# EAGLE board Board (EAGLE 9.7.0)
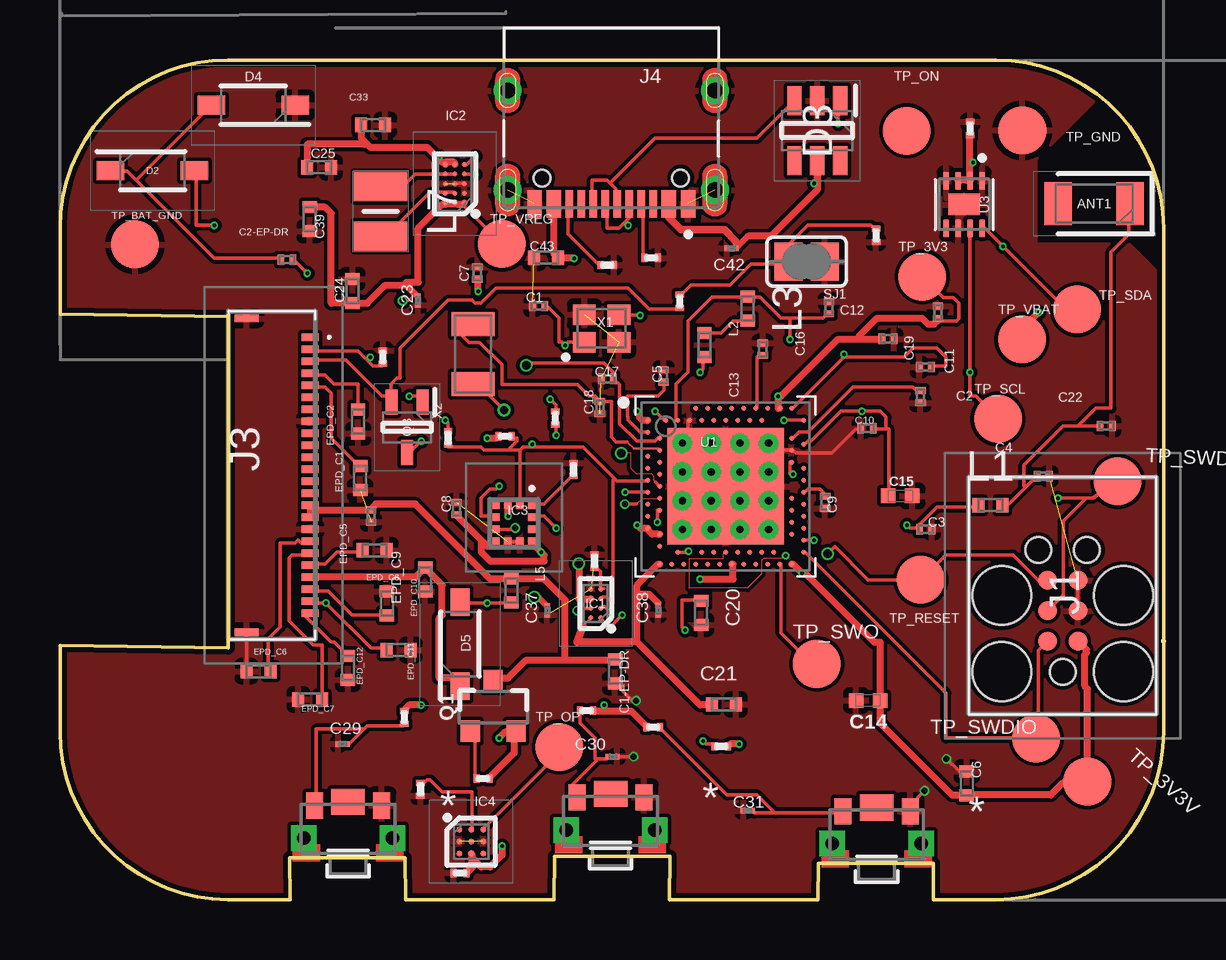
[diagram p0: board, top side]
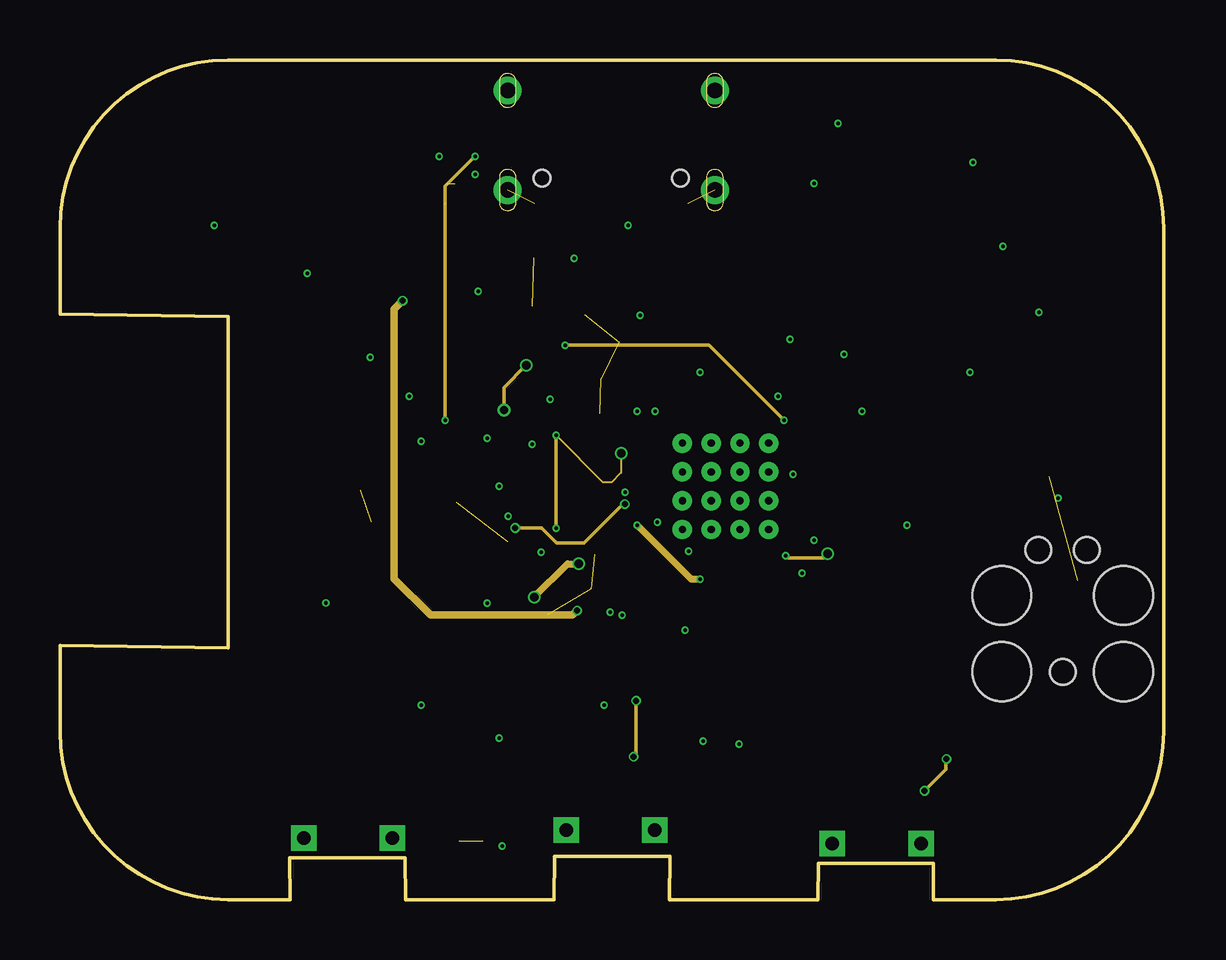
[diagram p1: board, inner layer Route2]
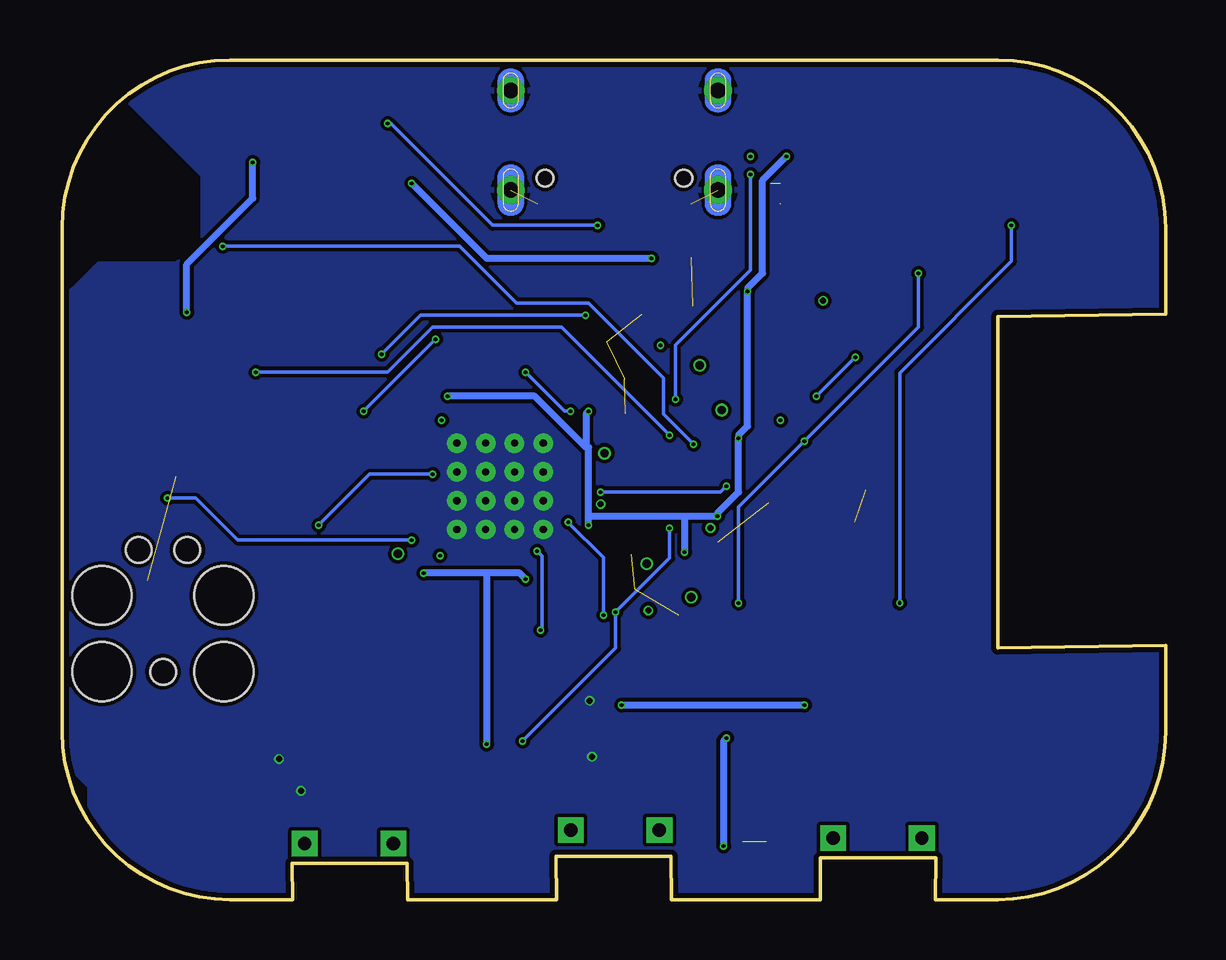
[diagram p2: board, bottom side, seen from below]

Size 46 x 35 mm. Coordinates in mm from the lower left corner, seen from the top.
Outline: 39,0 36.4,0 36.41,1.5 31.61,1.5 31.6,0 25.4,0 25.42,1.81 20.62,1.81 20.6,0 14.4,0 14.38,1.75 9.58,1.75 9.6,0 7,0 arc-90 0,7 0,10.6 7,10.5 7,24.3 0,24.4 0,28 arc-90 7,35 39,35 arc-90 46,28 46,7 arc-90 39,0
Copper layers (1+2*15+16): Top 0.035mm / dielectric 1.5mm / Route2 0.035mm / dielectric 0.15mm / Route15 0.035mm / dielectric 0.2mm / Bottom 0.035mm
Design rules "Fusion Electronics Design Rules *": minimum track width 6mil, minimum drill 0.15mm, track to track 6mil, track to pad 0.13mm, pad to pad 0.13mm, via to via 0.13mm, smd to smd 0.13mm, copper to edge 0.2mm, drill to drill 6mil, minimum pad ring 10mil, minimum via ring 0.075mm, stop-mask expansion 4mil, vias tented up to drill 9999mil, thermal gap 10mil
Net classes: 0 default: width 0.15 mm; 1 Putere: width 0.3 mm

## Footprints (pad centres in the part's own frame; a part is rotated, then mirrored left to right if it is on the bottom)
2450AT18B100E_ANTC3216X140N = smd 1.15 x 1.8: 1 -1.5,0; 2 1.5,0
NORDIC_NRF_3_RESC0201_L = smd 0.28 x 0.43: 1 -0.255,0; 2 0.255,0
NORDIC_NRF_3_RESC0402_L = smd 0.5 x 0.6: 1 -0.5,0; 2 0.5,0
0402-TIGHT = smd 0.6 x 0.6: 1 -0.5,0; 2 0.5,0
GRM011R60J152KE01L_2_CAPC0201X13N = smd 0.22 x 0.23: 1 -0.185,0; 2 0.185,0
GRM011R60J152KE01L_1_0201 = smd 0.35 x 0.25: 1 0,0.275; 2 0,-0.275
ESP32_C6_LIBRARY_5_SOD3716X135N = smd 1.15 x 0.8: 1 -1.75,0; 2 1.75,0
ESP32_C6_LIBRARY_3_SOT95P280X145-6N = smd 1.2 x 0.6: 1 -1.25,0.95; 2 -1.25,0; 3 -1.25,-0.95; 4 1.25,-0.95; 5 1.25,0; 6 1.25,0.95
BQ25180YBGR_BGA8C40P2X4_100X155X50 = smd 0.2 x 0.2: A1 -0.2,0.6; A2 0.2,0.6; B1 -0.2,0.2; B2 0.2,0.2; C1 -0.2,-0.2; C2 0.2,-0.2; D1 -0.2,-0.6; D2 0.2,-0.6
RT6160AWSC_BGA15C40P3X5_140X230X60 = smd 0.216 x 0.216: A1 -0.4,0.8; A2 0,0.8; A3 0.4,0.8; B1 -0.4,0.4; B2 0,0.4; B3 0.4,0.4; C1 -0.4,0; C2 0,0; C3 0.4,0; D1 -0.4,-0.4; D2 0,-0.4; D3 0.4,-0.4; E1 -0.4,-0.8; E2 0,-0.8; E3 0.4,-0.8
BMA423_BMA423 = smd 0.3 x 0.35: 1 -0.75,-0.775; 2 -0.25,-0.775; 3 0.25,-0.775; 4 0.75,-0.775; 7 0.75,0.775; 8 0.25,0.775; 9 -0.25,0.775; 10 -0.75,0.775 | smd 0.35 x 0.3: 5 0.775,-0.25; 6 0.775,0.25; 11 -0.775,0.25; 12 -0.775,-0.25
DRV2605YZFR_BGA9C50P3X3_144X144X62 = smd 0.25 x 0.25: A1 -0.5,0.5; A2 0,0.5; A3 0.5,0.5; B1 -0.5,0; B2 0,0; B3 0.5,0; C1 -0.5,-0.5; C2 0,-0.5; C3 0.5,-0.5
TC2030-IDC_TC2030IDC = smd 0.783 x 0.783: 1 -0.953,-0.635; 2 -0.953,0.635; 3 0.317,-0.635; 4 0.317,0.635; 5 1.588,-0.635; 6 1.588,0.635 | hole 2.451: -2.223,-2.54; -2.223,2.54; 0.952,-2.54; 0.952,2.54 | hole 1.067: -2.223,0; 2.857,-1.016; 2.857,1.016
503480-2400_5034802400 = smd 0.3 x 0.7: 1 -5.75,1.525; 2 -5.25,1.525; 3 -4.75,1.525; 4 -4.25,1.525; 5 -3.75,1.525; 6 -3.25,1.525; 7 -2.75,1.525; 8 -2.25,1.525; 9 -1.75,1.525; 10 -1.25,1.525; 11 -0.75,1.525; 12 -0.25,1.525; 13 0.25,1.525; 14 0.75,1.525; 15 1.25,1.525; 16 1.75,1.525; 17 2.25,1.525; 18 2.75,1.525; 19 3.25,1.525; 20 3.75,1.525; 21 4.25,1.525; 22 4.75,1.525; 23 5.25,1.525; 24 5.75,1.525 | smd 0.3 x 1: MP1 -6.54,-1.125; MP2 6.54,-1.125
KH-TYPE-C-16P_KINGHELM_KH-TYPE-C-16P = smd 0.6 x 1.15: A1_B12 -3.2,4.725; A4_B9 -2.4,4.725; A9_B4 2.4,4.725; A12_B1 3.2,4.725 | smd 0.3 x 1.15: A5 -1.25,4.725; A6 -0.25,4.725; A7 0.25,4.725; A8 1.25,4.725; B5 1.75,4.725; B6 0.75,4.725; B7 -0.75,4.725; B8 -1.75,4.725 | drill 0.65 pad 1.05: SH1 -4.32,0; SH2 4.32,0; SH3 -4.32,4.15; SH4 4.32,4.15 | hole 0.7: -2.89,3.65; 2.89,3.65
NORDIC_NRF_2_RESC0402_L = smd 0.5 x 0.6: 1 -0.5,0; 2 0.5,0
MLP2016SR47MT0S1_INDC2016X100N = smd 1.2 x 2.2: 1 -1.028,0; 2 1.028,0
ESP32_C6_LIBRARY_4_ESP32_C6_LIBRARY_4_ESP32_C6_LIBRARY_4_ESP32_C6_LIBRARY_4_ESP32_WROVER_SPARKFUN-DISCRETESEMI_SOT23-3 = smd 0.8 x 0.9: 1 -0.95,-1; 2 0.95,-1; 3 0,1.1
ESP32_C6_LIBRARY_6_SOT65P210X110-3N = smd 1.05 x 0.5: 1 -1.05,0.65; 2 -1.05,-0.65; 3 1.05,0
CPF0201D7K68C1_0201 = smd 0.35 x 0.25: 1 0,0.275; 2 0,-0.275
ERA-1AEB3401C_0201 = smd 0.35 x 0.25: 1 0,0.275; 2 0,-0.275
ESP32_C6_LIBRARY_7_JUMPER_SJ = smd 1.168 x 1.6: 1 -0.762,0; 2 0.762,0
2025-10-22_07-23-44_LIBRARY_SW_EVP-AKE31A_PAN = smd 0.711 x 1.092: 1 -1.4,-0.972; 2 1.4,-0.972 | drill 0.559 pad 0.914 square: 3 -1.848,0.381; 4 1.848,0.381 | smd 1.397 x 1.092: 5 0,-1.124
HECTOR_WATCH_1_TP20R = smd 2 x 2: TP 0,0
NORDIC_NRF_4_AQFN50P700X700X85_HS-74N = smd 4.85 x 4.85: P$74 0,0 | drill 0.3 pad 0.6: P$75 -1.8,1.8; P$76 -0.6,1.8; P$77 0.6,1.8; P$78 1.8,1.8; P$79 -1.8,0.6; P$80 -0.6,0.6; P$81 0.6,0.6; P$82 1.8,0.6; P$83 -1.8,-0.6; P$84 -0.6,-0.6; P$85 0.6,-0.6; P$86 1.8,-0.6; P$87 -1.8,-1.8; P$88 -0.6,-1.8; P$89 0.6,-1.8; P$90 1.8,-1.8 | smd 0.2 x 0.2: P$A8 -1.25,3.25; P$A10 -0.75,3.25; P$A12 -0.25,3.25; P$A14 0.25,3.25; P$A16 0.75,3.25; P$A18 1.25,3.25; P$A20 1.75,3.25; P$A22 2.25,3.25; P$A23 2.75,3.25; P$AA24 3.25,-2.25; P$AB2 -2.75,-2.5; P$AC5 -2,-2.75; P$AC9 -1,-2.75; P$AC11 -0.5,-2.75; P$AC13 0,-2.75; P$AC15 0.5,-2.75; P$AC17 1,-2.75; P$AC19 1.5,-2.75; P$AC21 2,-2.75; P$AC24 3.25,-2.75; P$AD2 -2.75,-3.25; P$AD4 -2.25,-3.25; P$AD6 -1.75,-3.25; P$AD8 -1.25,-3.25; P$AD10 -0.75,-3.25; P$AD12 -0.25,-3.25; P$AD14 0.25,-3.25; P$AD16 0.75,-3.25; P$AD18 1.25,-3.25; P$AD20 1.75,-3.25; P$AD22 2.25,-3.25; P$AD23 2.75,-3.25; P$B1 -3.25,2.75; P$B3 -2.5,2.75; P$B5 -2,2.75; P$B7 -1.5,2.75; P$B9 -1,2.75; P$B11 -0.5,2.75; P$B13 0,2.75; P$B15 0.5,2.75; P$B17 1,2.75; P$B19 1.5,2.75; P$B24 3.25,2.75; P$C1 -3.25,2.25; P$D2 -2.75,2; P$D23 2.75,2; P$E24 3.25,1.75; P$F2 -2.75,1.5; P$F23 2.75,1.5; P$G1 -3.25,1.25; P$H2 -2.75,1; P$H23 2.75,1; P$J1 -3.25,0.75; P$J24 3.25,0.75; P$K2 -2.75,0.5; P$L1 -3.25,0.25; P$L24 3.25,0.25; P$M2 -2.75,0; P$N1 -3.25,-0.25; P$N24 3.25,-0.25; P$P2 -2.75,-0.5; P$P23 2.75,-0.5; P$R1 -3.25,-0.75; P$R24 3.25,-0.75; P$T2 -2.75,-1; P$T23 2.75,-1; P$U1 -3.25,-1.25; P$U24 3.25,-1.25; P$V23 2.75,-1.5; P$W1 -3.25,-1.75; P$W24 3.25,-1.75; P$Y2 -2.75,-2; P$Y23 2.75,-2
ESP32_C6_LIBRARY_SON50P200X200X80-9N = smd 0.76 x 0.27: 1 -0.985,0.75; 2 -0.985,0.25; 3 -0.985,-0.25; 4 -0.985,-0.75; 5 0.985,-0.75; 6 0.985,-0.25; 7 0.985,0.25; 8 0.985,0.75 | smd 0.9 x 1.3: 9 0,0
NORDIC_NRF_BT-XTAL_2016_N = smd 0.95 x 0.85: 1 -0.725,-0.575; 2 0.725,-0.575; 3 0.725,0.575; 4 -0.725,0.575
NORDIC_NRF_1_XTAL_3215_N = smd 1 x 1.8: 1 -1.25,0; 2 1.25,0

## Placement (x,y rotation side)
ANT1  2450AT18B100E_2450AT18B100E  [2450AT18B100E_ANTC3216X140N]  43.11,29.01 180 top
C1  12pF  [NORDIC_NRF_3_RESC0201_L]  19.95,24.74 180 top
C1-EP-DR  10uF  [NORDIC_NRF_3_RESC0402_L]  23.14,9.51 270 top
C2  12pF  [NORDIC_NRF_3_RESC0201_L]  36.07,22.2 180 top
C2-EP-DR  4.7uF/25V  [NORDIC_NRF_3_RESC0201_L]  9.46,26.68 0 top
C3  1pF  [NORDIC_NRF_3_RESC0201_L]  36.09,15.44 0 top
C4  1pF  [NORDIC_NRF_3_RESC0201_L]  40.99,17.64 0 top
C5  100nF  [NORDIC_NRF_3_RESC0201_L]  25.15,21.83 90 top
C6  4.7uF  [NORDIC_NRF_3_RESC0402_L]  37.8,4.84 90 top
C7  100nF  [NORDIC_NRF_3_RESC0201_L]  17.4,26.12 90 top
C8  100nF  [NORDIC_NRF_3_RESC0201_L]  16.53,16.3 90 top
C9  820pF N.C.  [NORDIC_NRF_3_RESC0201_L]  31.89,16.56 270 top
C10  N.C.  [NORDIC_NRF_3_RESC0201_L]  33.64,19.64 180 top
C11  100pF  [NORDIC_NRF_3_RESC0201_L]  35.87,20.96 270 top
C12  100nF  [NORDIC_NRF_3_RESC0201_L]  34.51,23.37 0 top
C13  N.C.  [NORDIC_NRF_3_RESC0201_L]  29.3,22.94 90 top
C14  4.7uF  [0402-TIGHT]  33.69,8.3 180 top
C15  1.0uF  [0402-TIGHT]  35.03,16.83 0 top
C16  47nF  [NORDIC_NRF_3_RESC0201_L]  32.05,24.67 90 top
C17  12pF  [NORDIC_NRF_3_RESC0201_L]  22.81,21.71 0 top
C18  12pF  [NORDIC_NRF_3_RESC0201_L]  22.51,20.51 90 top
C19  100nF  [NORDIC_NRF_3_RESC0201_L]  36.6,24.48 90 top
C20  4.7uF  [NORDIC_NRF_3_RESC0402_L]  26.73,11.96 270 top
C21  4.7uF  [NORDIC_NRF_3_RESC0402_L]  27.67,8.13 0 top
C22  N.C.  [NORDIC_NRF_3_RESC0201_L]  43.61,19.74 0 top
C23  0.1uF  [GRM011R60J152KE01L_2_CAPC0201X13N]  14.92,24.96 90 top
C24  10uF  [NORDIC_NRF_3_RESC0402_L]  12.19,25.37 270 top
C25  22uF  [NORDIC_NRF_3_RESC0402_L]  10.8,30.52 0 top
C27  0.1uF  [GRM011R60J152KE01L_1_0201]  37.94,32.15 0 top
C29  1uF  [GRM011R60J152KE01L_2_CAPC0201X13N]  11.79,6.48 0 top
C30  1uF  [GRM011R60J152KE01L_2_CAPC0201X13N]  23.04,5.96 180 top
C31  1uF  [GRM011R60J152KE01L_2_CAPC0201X13N]  28.67,3.7 0 top
C32  1uF  [GRM011R60J152KE01L_1_0201]  15.03,4.59 180 top
C33  22uF  [NORDIC_NRF_3_RESC0402_L]  13.05,32.29 0 top
C34  0.1uF  [GRM011R60J152KE01L_1_0201]  16.68,1.11 90 top
C37  1uF  [GRM011R60J152KE01L_2_CAPC0201X13N]  20.31,12.05 90 top
C38  1uF  [GRM011R60J152KE01L_2_CAPC0201X13N]  24.93,12.06 90 top
C39  10uF  [NORDIC_NRF_3_RESC0402_L]  10.41,28.36 270 top
C42  0.1uF  [GRM011R60J152KE01L_2_CAPC0201X13N]  27.99,27.15 180 top
C43  4.7uF\  [NORDIC_NRF_3_RESC0402_L]  20.27,26.75 180 top
D2  ESP32_C6_LIBRARY_5_MBR0530  [ESP32_C6_LIBRARY_5_SOD3716X135N]  3.86,30.39 0 top
D3  USBLC6-2SC6Y  [ESP32_C6_LIBRARY_3_SOT95P280X145-6N]  31.57,32.06 270 top
D4  ESP32_C6_LIBRARY_5_MBR0530  [ESP32_C6_LIBRARY_5_SOD3716X135N]  8.06,33.11 180 top
D5  ESP32_C6_LIBRARY_5_MBR0530  [ESP32_C6_LIBRARY_5_SOD3716X135N]  16.67,10.65 90 top
EPD_C1  1uF/50V  [NORDIC_NRF_3_RESC0402_L]  12.51,17.57 90 top
EPD_C2  1uF/50V  [NORDIC_NRF_3_RESC0402_L]  12.43,19.93 90 top
EPD_C5  0.1uF/50V  [NORDIC_NRF_3_RESC0201_L]  12.97,15.99 90 top
EPD_C6  1uF/50V  [NORDIC_NRF_3_RESC0402_L]  8.27,9.52 0 top
EPD_C7  1uF/50V  [NORDIC_NRF_3_RESC0402_L]  10.44,8.34 0 top
EPD_C8  1uF/50V  [NORDIC_NRF_3_RESC0402_L]  13.12,14.56 180 top
EPD_C9  1uF/50V  [NORDIC_NRF_3_RESC0402_L]  15.22,13.34 90 top
EPD_C10  1uF/50V  [NORDIC_NRF_3_RESC0402_L]  13.63,12.35 270 top
EPD_C11  1uF/50V  [NORDIC_NRF_3_RESC0402_L]  14.12,10.4 180 top
EPD_C12  1uF/50V  [NORDIC_NRF_3_RESC0402_L]  12,9.65 90 top
IC1  BQ25180YBGR_BQ25180YBGR  [BQ25180YBGR_BGA8C40P2X4_100X155X50]  22.33,12.34 180 top
IC2  RT6160AWSC_RT6160AWSC  [RT6160AWSC_BGA15C40P3X5_140X230X60]  16.46,29.84 180 top
IC3  BMA423_BMA423  [BMA423_BMA423]  18.92,15.69 180 top
IC4  DRV2605YZFR  [DRV2605YZFR_BGA9C50P3X3_144X144X62]  17.14,2.42 0 top
J1  TC2030-IDC_TC2030-IDC  [TC2030-IDC_TC2030IDC]  41.79,11.72 90 top
J3  503480-2400  [503480-2400_5034802400]  8.9,17.69 270 top
J4  KH-TYPE-C-16P  [KH-TYPE-C-16P_KINGHELM_KH-TYPE-C-16P]  22.98,33.73 180 top
L1  3.9nH  [NORDIC_NRF_2_RESC0402_L]  38.78,16.44 0 top
L2  10uH  [NORDIC_NRF_2_RESC0402_L]  26.87,23.11 270 top
L3  15nH  [NORDIC_NRF_2_RESC0402_L]  28.66,24.64 270 top
L5  68uH  [NORDIC_NRF_2_RESC0402_L]  18.81,12.89 270 top
L7  MLP2016SR47MT0S1_FTC252012SR47MBCA  [MLP2016SR47MT0S1_INDC2016X100N]  13.37,28.69 90 top
Q1  20V/4.2A/52mΩ/1.4W  [ESP32_C6_LIBRARY_4_ESP32_C6_LIBRARY_4_ESP32_C6_LIBRARY_4_ESP32_C6_LIBRARY_4_ESP32_WROVER_SPARKFUN-DISCRETESEMI_SOT23-3]  18.06,8.02 0 top
Q3  ESP32_C6_LIBRARY_6_SI1308EDL-T1-GE3  [ESP32_C6_LIBRARY_6_SOT65P210X110-3N]  14.47,19.69 270 top
R1  CPF0201D7K68C1_CPF0201D7K68C1  [CPF0201D7K68C1_0201]  21.41,17.92 0 top
R1_EP_DR  0.47  [CPF0201D7K68C1_0201]  25.84,24.94 0 top
R1_USB  5.1K ohm  [CPF0201D7K68C1_0201]  24.65,26.75 270 top
R2  0  [CPF0201D7K68C1_0201]  16.18,19.25 180 top
R2_EP_DR  10K  [CPF0201D7K68C1_0201]  13.46,22.62 0 top
R2_USB  5.1K  [CPF0201D7K68C1_0201]  22.81,26.45 90 top
R4  0  [CPF0201D7K68C1_0201]  20.64,20.07 180 top
R5  10K  [CPF0201D7K68C1_0201]  21.95,7.88 90 top
R7  10K  [CPF0201D7K68C1_0201]  14.35,7.59 180 top
R8  10K  [CPF0201D7K68C1_0201]  24.73,7.19 270 top
R9  10K  [CPF0201D7K68C1_0201]  22.28,14.11 0 top
R17  3.3K  [ERA-1AEB3401C_0201]  27.56,6.38 270 top
R18  3.3k  [ERA-1AEB3401C_0201]  18.55,19.32 90 top
R_PWR_EPD  10K  [CPF0201D7K68C1_0201]  17.63,5.04 90 top
R_TYPE_SEL  2.2  [CPF0201D7K68C1_0201]  34.01,27.69 180 top
SJ1  [ESP32_C6_LIBRARY_7_JUMPER_SJ]  31.12,26.59 180 top
SW_DN  2025-10-22_07-23-44_LIBRARY_EVP-AKE31ASW_EVP-AKE31A_PAN  [2025-10-22_07-23-44_LIBRARY_SW_EVP-AKE31A_PAN]  12.01,2.95 180 top
SW_ENT  2025-10-22_07-23-44_LIBRARY_EVP-AKE31ASW_EVP-AKE31A_PAN  [2025-10-22_07-23-44_LIBRARY_SW_EVP-AKE31A_PAN]  34.04,2.71 180 top
SW_UP  2025-10-22_07-23-44_LIBRARY_EVP-AKE31ASW_EVP-AKE31A_PAN  [2025-10-22_07-23-44_LIBRARY_SW_EVP-AKE31A_PAN]  22.95,3.28 180 top
TP_3V3  HECTOR_WATCH_1_TPTP20R  [HECTOR_WATCH_1_TP20R]  35.94,25.96 0 top
TP_3V3V  HECTOR_WATCH_1_TPTP20R  [HECTOR_WATCH_1_TP20R]  42.82,4.91 0 top
TP_BAT_GND  HECTOR_WATCH_1_TPTP20R  [HECTOR_WATCH_1_TP20R]  3.13,27.31 0 top
TP_GND  HECTOR_WATCH_1_TPTP20R  [HECTOR_WATCH_1_TP20R]  40.11,32.07 0 top
TP_ON  HECTOR_WATCH_1_TPTP20R  [HECTOR_WATCH_1_TP20R]  35.3,32.05 0 top
TP_OP  HECTOR_WATCH_1_TPTP20R  [HECTOR_WATCH_1_TP20R]  20.82,6.36 0 top
TP_RESET  HECTOR_WATCH_1_TPTP20R  [HECTOR_WATCH_1_TP20R]  35.88,13.32 0 top
TP_SCL  HECTOR_WATCH_1_TPTP20R  [HECTOR_WATCH_1_TP20R]  39.1,20.03 0 top
TP_SDA  HECTOR_WATCH_1_TPTP20R  [HECTOR_WATCH_1_TP20R]  42.4,24.6 0 top
TP_SWDCLK  HECTOR_WATCH_1_TPTP20R  [HECTOR_WATCH_1_TP20R]  44.09,17.43 0 top
TP_SWDIO  HECTOR_WATCH_1_TPTP20R  [HECTOR_WATCH_1_TP20R]  40.69,6.72 0 top
TP_SWO  HECTOR_WATCH_1_TPTP20R  [HECTOR_WATCH_1_TP20R]  31.54,9.82 0 top
TP_VBAT  HECTOR_WATCH_1_TPTP20R  [HECTOR_WATCH_1_TP20R]  40.1,23.35 0 top
TP_VREG  HECTOR_WATCH_1_TPTP20R  [HECTOR_WATCH_1_TP20R]  18.42,27.32 0 top
U1  NORDIC_NRF_4_NRF52840_QF  [NORDIC_NRF_4_AQFN50P700X700X85_HS-74N]  27.74,17.23 0 top
U3  MAX17048G+T10  [ESP32_C6_LIBRARY_SON50P200X200X80-9N]  37.69,28.97 270 top
X1  32MHz  [NORDIC_NRF_BT-XTAL_2016_N]  22.58,23.81 0 top
X2  32.768kHz  [NORDIC_NRF_1_XTAL_3215_N]  17.22,22.74 90 top

## Library data of the parts
ANT1 = InkTime_v5; ARROW_PART_NUMBER: 2450AT18B100E; ARROW_PRICE-STOCK: https://www.arrow.com/en/products/2450at18b100e/johanson-dielectrics?utm_currency=USD&region=nac; DESCRIPTION: Antennas 2.45GHz ANTENNA; HEIGHT: 1.4mm; MANUFACTURER_NAME: JOHANSON TECHNOLOGY; MANUFACTURER_PART_NUMBER: 2450AT18B100E; MOUSER_PART_NUMBER: 609-2450AT18B100E; MOUSER_PRICE-STOCK: https://www.mouser.co.uk/ProductDetail/Johanson-Technology/2450AT18B100E?qs=yCnrNFeXz%252Bh5MFsFIXGZGA%3D%3D
C1 C1-EP-DR C2 C2-EP-DR C3-C13 C16-C22 C24 C25 C27 C32-C34 C39 C43 EPD_C1 EPD_C2 EPD_C5-EPD_C12 L1-L3 L5 R1 R1_EP_DR R1_USB R2 R2_EP_DR R2_USB R4 R9 R17 R18 R_PWR_EPD R_TYPE_SEL SJ1 TP_3V3 TP_3V3V TP_BAT_GND TP_GND TP_ON TP_OP TP_RESET TP_SCL TP_SDA TP_SWDCLK TP_SWDIO TP_SWO TP_VBAT TP_VREG U1 X1 X2 = InkTime_v5
C14 = SparkFun-Capacitors; PROD_ID: CAP-14846
C15 = SparkFun-Capacitors; PROD_ID: CAP-15129
C23 C37 C38 C42 = InkTime_v5; AVAILABILITY: In Stock; CHECK_PRICES: https://www.snapeda.com/parts/GRM011R60J152KE01L/Murata/view-part/?ref=eda; DESCRIPTION: SMD Capacitor X5R(EIA) with Capacitance: 1500pF Tol. 10%. Rated Voltage: 6.3Vdc; MF: Murata; MP: GRM011R60J152KE01L; PACKAGE: 0201 Murata; PRICE: None; SNAPEDA_LINK: https://www.snapeda.com/parts/GRM011R60J152KE01L/Murata/view-part/?ref=snap
C29-C31 = Libraria_DANI; AVAILABILITY: In Stock; CHECK_PRICES: https://www.snapeda.com/parts/GRM011R60J152KE01L/Murata/view-part/?ref=eda; DESCRIPTION: SMD Capacitor X5R(EIA) with Capacitance: 1500pF Tol. 10%. Rated Voltage: 6.3Vdc; MF: Murata; MP: GRM011R60J152KE01L; PACKAGE: 0201 Murata; PRICE: None; SNAPEDA_LINK: https://www.snapeda.com/parts/GRM011R60J152KE01L/Murata/view-part/?ref=snap
D2 D4 D5 = InkTime_v5; AVAILABILITY: In Stock; CHECK_PRICES: https://www.snapeda.com/parts/MBR0530/Onsemi/view-part/?ref=eda; DESCRIPTION: Diode Schottky 30 V 500mA Surface Mount SOD-123; MF: ON Semiconductor; MP: MBR0530; PACKAGE: SOD-123-2 ON Semiconductor; PRICE: None; PURCHASE-URL: https://www.snapeda.com/api/url_track_click_mouser/?unipart_id=179458&manufacturer=ON Semiconductor&part_name=MBR0530&search_term=None; SNAPEDA_LINK: https://www.snapeda.com/parts/MBR0530/Onsemi/view-part/?ref=snap
D3 = InkTime_v5; AVAILABILITY: In Stock; CHECK_PRICES: https://www.snapeda.com/parts/USBLC6-2SC6Y/STMicroelectronics/view-part/?ref=eda; DESCRIPTION: 17V Clamp 5A (8/20µs) Ipp Tvs Diode Surface Mount SOT-23-6; MF: STMicroelectronics; MP: USBLC6-2SC6Y; PACKAGE: SOT-23-6 STMicroelectronics; PRICE: None; SNAPEDA_LINK: https://www.snapeda.com/parts/USBLC6-2SC6Y/STMicroelectronics/view-part/?ref=snap
IC1 = InkTime_v5; ARROW_PART_NUMBER: BQ25180YBGR; ARROW_PRICE-STOCK: https://www.arrow.com/en/products/bq25180ybgr/texas-instruments?utm_currency=USD&region=nac; DESCRIPTION: Charger IC Lithium Ion/Polymer, Lithium Iron Phosphate 8-DSBGA (1.6x1.1); HEIGHT: 0.5mm; MANUFACTURER_NAME: Texas Instruments; MANUFACTURER_PART_NUMBER: BQ25180YBGR; MOUSER_PART_NUMBER: 595-BQ25180YBGR; MOUSER_PRICE-STOCK: https://www.mouser.co.uk/ProductDetail/Texas-Instruments/BQ25180YBGR?qs=doiCPypUmgEWjAK%252BJAX6Tw%3D%3D
IC2 = InkTime_v5; DESCRIPTION: Buck-Boost Regulator Positive Output Step-Up/Step-Down I2C DC-DC Controller IC 15-WL-CSP (BSC) (1.4x2.3); HEIGHT: 0.6mm; MANUFACTURER_NAME: RICHTEK; MANUFACTURER_PART_NUMBER: RT6160AWSC; MOUSER_PART_NUMBER: 835-RT6160AWSC; MOUSER_PRICE-STOCK: https://www.mouser.co.uk/ProductDetail/Richtek/RT6160AWSC?qs=amGC7iS6iy%2FLd9PSoixZXQ%3D%3D
IC3 = InkTime_v5; ARROW_PART_NUMBER: BMA423; ARROW_PRICE-STOCK: https://www.arrow.com/en/products/bma423/bosch; DESCRIPTION: Accelerometers Triaxial low-g 12bit Acceleration Sensor; HEIGHT: 1mm; MANUFACTURER_NAME: BOSCH; MANUFACTURER_PART_NUMBER: BMA423; MOUSER_PART_NUMBER: 262-BMA423; MOUSER_PRICE-STOCK: https://www.mouser.co.uk/ProductDetail/Bosch-Sensortec/BMA423?qs=HXFqYaX1Q2xC%252BSgeGoX3mg%3D%3D
IC4 = InkTime_v5; ARROW_PART_NUMBER: DRV2605YZFR; ARROW_PRICE-STOCK: https://www.arrow.com/en/products/drv2605yzfr/texas-instruments?region=nac; DESCRIPTION: Haptic Driver for ERM/LRA with Built-In Library and Smart Loop Architecture; HEIGHT: 0.625mm; MANUFACTURER_NAME: Texas Instruments; MANUFACTURER_PART_NUMBER: DRV2605YZFR
J1 = InkTime_v5; DESCRIPTION: CABLE ADAPTER 6 POS; HEIGHT: 19mm; MANUFACTURER_NAME: Tag Connect; MANUFACTURER_PART_NUMBER: TC2030-IDC
J3 = InkTime_v5; DESCRIPTION: FFC & FPC Connectors 0.5mm FPC RA SMT Dual Contact 24Ckt; HEIGHT: 1.87mm; MANUFACTURER_NAME: Molex; MANUFACTURER_PART_NUMBER: 503480-2400; MOUSER_PART_NUMBER: 538-503480-2400; MOUSER_PRICE-STOCK: https://www.mouser.co.uk/ProductDetail/Molex/503480-2400?qs=OAhjpuo3Vu7efIoxFh9AOw%3D%3D
J4 = InkTime_v5; AVAILABILITY: Not in stock; CHECK_PRICES: https://www.snapeda.com/parts/KH-TYPE-C-16P/Kinghelm/view-part/?ref=eda; MF: kinghelm; MP: KH-TYPE-C-16P; PACKAGE: None; PRICE: None; SNAPEDA_LINK: https://www.snapeda.com/parts/KH-TYPE-C-16P/Kinghelm/view-part/?ref=snap
L7 = InkTime_v5; DESCRIPTION: SMD / SMT Inductors (Coils), L=0.47?H, L x W x T :; HEIGHT: 1mm; JLCPCB: https://jlcpcb.com/partdetail/6763488-FTC252012SR47MBCA/C5832368; MANUFACTURER_NAME: TDK; MANUFACTURER_PART_NUMBER: FTC252012SR47MBCA
Q1 = InkTime_v5; PROD_ID: TRAN-14388
Q3 = InkTime_v5; AVAILABILITY: In Stock; CHECK_PRICES: https://www.snapeda.com/parts/SI1308EDL-T1-GE3/Vishay+Siliconix/view-part/?ref=eda; DESCRIPTION: Si1308EDL-T1-GE3 N-channel MOSFET Transistor, 1.5 A, 30 V, 3-Pin SC-70 | Siliconix / Vishay SI1308EDL-T1-GE3; MF: Vishay Siliconix; MP: SI1308EDL-T1-GE3; PACKAGE: SOT-323 Vishay Semiconductor; PRICE: None; PURCHASE-URL: https://www.snapeda.com/api/url_track_click_mouser/?unipart_id=274603&manufacturer=Vishay Siliconix&part_name=SI1308EDL-T1-GE3&search_term=None; SNAPEDA_LINK: https://www.snapeda.com/parts/SI1308EDL-T1-GE3/Vishay+Siliconix/view-part/?ref=snap
R5 R7 R8 = Libraria_DANI
SW_DN SW_ENT SW_UP = Libraria_DANI; COPYRIGHT: Copyright (C) 2025 Ultra Librarian. All rights reserved.; DIGI-KEY_PART_NUMBER_1: P123437TR-ND; DIGI-KEY_PART_NUMBER_2: P123437CT-ND; DIGI-KEY_PART_NUMBER_3: P123437DKR-ND; MANUFACTURER_NAME: Panasonic; MANUFACTURER_PART_NUMBER: EVP-AKE31A
U3 = InkTime_v5; AVAILABILITY: In Stock; CHECK_PRICES: https://www.snapeda.com/parts/MAX17048G+T10/Analog+Devices/view-part/?ref=eda; DESCRIPTION: 3µA 1-Cell/2-Cell Fuel Gauge with ModelGauge; MF: Analog Devices; MP: MAX17048G+T10; PACKAGE: TDFN-8 Maxim; PRICE: None; PURCHASE-URL: https://www.snapeda.com/api/url_track_click_mouser/?unipart_id=329239&manufacturer=Analog Devices&part_name=MAX17048G+T10&search_term=None; SNAPEDA_LINK: https://www.snapeda.com/parts/MAX17048G+T10/Analog+Devices/view-part/?ref=snap

## Nets
3V3/1.7D [Putere]: C34.2 IC4.C2 Q1.2 R_PWR_EPD.2
3V3/1.7D1 [Putere]: R5.2 R7.2 R8.2
3V3/2.4A [Putere]: C6.1 C7.1 C8.1 C12.1 C14.1 C19.1 C25.1 C33.1 IC2.E2 IC2.E3 IC3.3 IC3.7 IC3.10 J1.1 R17.1 R18.1 TP_3V3.TP TP_3V3V.TP U1.P$A22 U1.P$AD14 U1.P$AD23 U1.P$B1 U1.P$W1 U1.P$Y2
ALERT/1.6C: U3.5
ALERT/2.5C: U1.P$J24
D+/1.5D: D3.4
D+/2.7D: U1.P$AD6
D-/1.5D: D3.6
D-/2.7D: U1.P$AD4
DN: D3.1 J4.A7 J4.B7
DP: D3.3 J4.A6 J4.B6
EPD_3V3 [Putere]: C1-EP-DR.1 EPD_C5.2 J3.15 J3.16 L5.1 Q1.3
EPD_BUSY/1.5D: J3.9
EPD_BUSY/2.2D: U1.P$AD12
EPD_CS/1.4C: J3.12
EPD_CS/2.2D: U1.P$K2
EPD_DC/1.5D: J3.11
EPD_DC/2.2D: U1.P$AD10
EPD_RST/1.5D: J3.10
EPD_RST/2.2D: U1.P$AC11
GDR: J3.2 Q3.1 R2_EP_DR.2
GND: C1-EP-DR.2 C1.2 C2.2 C3.2 C4.2 C5.2 C6.2 C7.2 C8.2 C9.2 C10.2 C11.2 C12.2 C13.2 C14.2 C15.2 C16.2 C17.1 C18.1 C19.2 C20.2 C21.2 C22.2 C23.1 C24.1 C25.2 C27.1 C29.1 C30.1 C31.1 C32.1 C33.2 C34.1 C37.1 C38.1 C39.2 C42.2 C43.2 D3.2 D4.1 EPD_C1.1 EPD_C2.1 EPD_C5.1 EPD_C6.1 EPD_C7.1 EPD_C8.1 EPD_C9.1 EPD_C10.1 EPD_C11.1 EPD_C12.1 IC1.D2 IC2.B1 IC2.C1 IC2.C2 IC2.C3 IC3.8 IC3.9 IC4.B1 IC4.B3 J1.3 J1.5 J3.8 J3.17 J3.MP1 J3.MP2 J4.A1_B12 J4.A12_B1 J4.SH1 J4.SH2 J4.SH3 J4.SH4 R1.1 R1_USB.1 R2_EP_DR.1 R2_USB.2 R9.1 R_TYPE_SEL.1 SJ1.1 SW_DN.1 SW_ENT.1 SW_UP.1 TP_BAT_GND.TP TP_GND.TP U1.P$74 U1.P$75 U1.P$76 U1.P$77 U1.P$78 U1.P$79 U1.P$80 U1.P$81 U1.P$82 U1.P$83 U1.P$84 U1.P$85 U1.P$86 U1.P$87 U1.P$88 U1.P$89 U1.P$90 U1.P$B7 U1.P$F23 U3.1 U3.4 U3.6 U3.9 X1.2 X1.4
HAPTIC_EN/1.4C: IC4.A1
HAPTIC_EN/2.6A: U1.P$U1
IMU_INT1: IC3.5 U1.P$N1
IMU_INT2: IC3.6 U1.P$P2
LX1: IC2.B2 IC2.B3 L7.1
LX2: IC2.D2 IC2.D3 L7.2
MOSI/1.5B: J3.14
MOSI/2.2D: U1.P$B13
N$1: C20.1 U1.P$AC5
N$2: C18.2 U1.P$F2 X2.2
N$3: L2.2 U1.P$B3
N$4: L2.1 L3.2
N$5: C1.1 U1.P$B24 X1.1
N$6: C13.1 U1.P$A18
N$7: C11.1 U1.P$D23
N$8: C10.1 C15.1 C16.1 L3.1 U1.P$B5 U1.P$E24
N$10: C17.2 U1.P$D2 X2.1
N$11: C5.1 U1.P$C1
N$12: C2.1 U1.P$A23 X1.3
N$14: C3.1 L1.1 U1.P$H23
N$15: ANT1.1 C4.1 C22.1 L1.2
N$17: IC1.D1 R9.2
N$18: C9.1 U1.P$N24
N$19: IC2.D1 R4.2
N$20: IC3.1 R1.2
N$21: C32.2 IC4.A2
N$22: J4.A5 R1_USB.2
N$23: IC2.E1 R2.2
N$24: C2-EP-DR.1 D2.1 D4.2
N$25: C2-EP-DR.2 D5.2 L5.2 Q3.3
N$26: R1_EP_DR.1 R_TYPE_SEL.2 SJ1.2
N$45: J4.B5 R2_USB.1
N$46: EPD_C2.2 J3.4
N$47: EPD_C1.2 J3.5
N$48: EPD_C6.2 J3.18
N$49: EPD_C7.2 J3.19
N$50: EPD_C8.2 J3.20
N$51: EPD_C10.2 J3.22
N$52: EPD_C12.2 J3.24
OUT: IC4.C3
OUT+: IC4.A3 TP_OP.TP
OUT-: TP_ON.TP
P0.04: U1.P$J1
P0.09: U1.P$L24
P0.13/1.5D: C30.2 R5.1 SW_UP.2
P0.13/2.6C: U1.P$AD8
P0.14/1.5D: C31.2 R8.1 SW_ENT.2
P0.14/2.7C: U1.P$AC9
P0.19: U1.P$AC15
P0.20: U1.P$AD16
P0.21: U1.P$AC17
P0.22: U1.P$AD18
P0.23: U1.P$AC19
P0.24: U1.P$AD20
P0.25: U1.P$AC21
P0.26: U1.P$G1
P0.27: U1.P$H2
P0.28: U1.P$B11
P0.29: U1.P$A10
P0.30: U1.P$B9
P0.31: U1.P$A8
P1.01/1.6C: Q1.1 R_PWR_EPD.1
P1.01/2.4B: U1.P$Y23
P1.02/1.6C: C29.2 R7.1 SW_DN.2
P1.02/2.8C: U1.P$W24
P1.03: U1.P$V23
P1.04: U1.P$U24
P1.05: U1.P$T23
P1.06: U1.P$R24
P1.07: U1.P$P23
P1.09: U1.P$R1
P1.10: U1.P$A20
P1.11: U1.P$B19
P1.12: U1.P$B17
P1.13: U1.P$A16
P1.14: U1.P$B15
P1.15: U1.P$A14
PMIC_INT: IC1.A1 U1.P$T2
PREVGH [Putere]: D5.1 EPD_C9.2 J3.21
PREVGL: D2.2 EPD_C11.2 J3.23
RESE: J3.3 Q3.2 R1_EP_DR.2
RESET: J1.6 TP_RESET.TP U1.P$AC13
SCK/1.5B: J3.13
SCK/2.2D: U1.P$A12
SCL/1.4C: IC4.C1
SCL/2.4C: IC1.B1 IC3.12 R4.1 R17.2 TP_SCL.TP U1.P$M2 U3.7
SDA/1.4C: IC4.B2
SDA/2.4C: IC1.C1 IC3.2 R2.1 R18.2 TP_SDA.TP U1.P$L1 U3.8
SWDCLK: J1.4 TP_SWDCLK.TP U1.P$AA24
SWDIO: J1.2 TP_SWDIO.TP U1.P$AC24
SWO: TP_SWO.TP U1.P$AD22
VBAT/1.2A [Putere]: C27.2 TP_VBAT.TP U3.2 U3.3
VBAT/2.5C [Putere]: C37.2 IC1.C2
VBUS/1.5D [Putere]: C42.1 C43.1 D3.5 J4.A4_B9 J4.A9_B4
VBUS/2.6D [Putere]: C21.1 C38.2 IC1.A2 U1.P$AD2
VREG [Putere]: C23.2 C24.2 C39.1 IC1.B2 IC2.A1 IC2.A2 IC2.A3 TP_VREG.TP

## Tracks (layer width: path | path; a pad name or v marks a point on that pad's centre or on a via)
3V3/1.7D  (via drill 0.15)
  Top 0.3: v18.43,2.23 18.43,1.86 17.93,1.36 17.55,1.36 17.18,1.73 17.18,1.86 IC4.C2 | v18.3,6.73 18.55,6.98 18.93,6.98 Q1.2 18.93,6.86 18.93,6.11 17.93,5.11 R_PWR_EPD.2
  Top 0.305: C34.2 17.18,1.34 17.18,1.73
  Bottom 0.3: v18.43,2.23 18.43,6.61 v18.3,6.73
3V3/1.7D1  (via drill 0.15)
  Top 0.3: 22.68,7.86 22.3,7.86 R5.2 | 22.68,7.86 23.8,7.86 24.43,7.23 R8.2 | v15.05,8.11 14.55,8.11 14.43,7.98 R7.2 | v22.68,8.11 22.68,7.86
  Bottom 0.3: v22.68,8.11 v15.05,8.11
3V3/2.4A  (via drill 0.15)
  Top 0.152: TP_3V3.TP 36.82,25.09 37.25,25.09 37.46,24.87 37.46,24.21 37.36,24.11 36.55,24.11
  Top 0.3: 16.05,30.73 16.43,30.73 IC2.E2 | 16.05,30.73 IC2.E3 | 15.74,30.92 15.3,31.36 12.93,31.36 12.74,31.54 | 15.74,30.92 15.93,30.73 16.05,30.73 | 12.74,31.54 12.55,31.73 12.55,32.23 C33.1 | C25.1 10.3,30.61 10.3,31.48 12.68,31.48 12.74,31.54 | 17.62,14.92 16.55,15.98 C8.1 | 17.62,14.92 17.8,14.73 17.93,14.73 18.05,14.86 IC3.7 | IC3.10 19.68,14.86 v20.05,14.48 20.18,14.36 20.18,14.11 17.93,14.11 17.55,14.48 17.55,14.86 17.62,14.92 | 24.43,15.48 24.68,15.23 24.93,15.23 U1.P$Y2 | 24.43,15.48 U1.P$W1 | v24.05,20.36 24.14,20.27 24.14,20.12 24.29,19.97 24.47,19.97 24.48,19.96 U1.P$B1 | v24.05,15.61 24.18,15.48 24.43,15.48 | v26.68,13.36 28.05,13.36 28.05,13.98 U1.P$AD14 | U1.P$A22 29.93,20.48 v29.93,20.98 30.05,20.98 32.43,23.36 33.3,23.36 | U1.P$AD23 30.55,13.98 v30.93,13.61 31.05,13.61 33.93,10.73 34.18,10.73 34.18,8.36 C14.1 34.18,8.23 34.18,7.36 37.18,4.36 37.68,4.36 C6.1 37.8,4.36 41.3,4.36 41.8,4.86 42.8,4.86 TP_3V3V.TP 42.82,8.78 42.73,8.88 42.73,10.23 42.78,10.28 42.78,10.42 J1.1 | v18.68,15.98 18.68,16.36 IC3.3 | v17.8,19.23 18.18,19.23 R18.1 | v28.3,6.48 27.93,6.48 R17.1 | v17.43,25.36 17.43,25.86 C7.1 | 33.3,23.36 34.18,23.36 C12.1 | C19.1 36.55,24.11 36.43,23.98 36.18,23.98 35.93,24.23 34.05,24.23 33.3,23.48 33.3,23.36 | v15.8,30.98 15.74,30.92
  Route2 0.3: v26.68,13.36 26.3,13.36 v24.05,15.61
  Bottom 0.3: v24.05,15.61 24.05,15.98 | 24.05,15.98 24.05,18.86 24.15,18.86 | v24.05,20.36 24.15,20.26 24.15,18.86 | v29.93,20.98 26.3,20.98 24.18,18.86 24.15,18.86 | 28.3,13.61 26.93,13.61 v26.68,13.36 | 28.3,13.61 v30.93,13.61 | 24.05,15.98 20.05,15.98 | 20.05,15.98 v18.68,15.98 18.68,16.11 17.8,16.98 v17.8,19.23 17.8,19.36 17.43,19.73 v17.43,25.36 17.43,25.48 16.8,26.11 16.8,29.98 v15.8,30.98 | 28.3,13.61 v28.3,6.48 | 20.05,15.98 v20.05,14.48
DN  (via drill 0.15)
  Top 0.152: 23.55,28.23 23.8,28.48 23.8,28.98 J4.B7 | 23.55,28.23 23.3,27.98 22.8,27.98 22.8,28.98 J4.A7 | v32.43,32.36 32.43,33.23 D3.1 | 23.55,28.23 v23.68,28.11
  Bottom 0.152: v32.43,32.36 32.3,32.36 28.05,28.11 v23.68,28.11
DP
  Top 0.152: 22.93,29.86 23.18,29.61 23.18,29.11 J4.A6 | 22.93,29.86 22.8,29.98 22.18,29.98 22.18,29.11 J4.B6 | 22.93,29.86 24.8,31.73 29.05,31.73 30.55,33.23 D3.3
EPD_3V3
  Top 0.3: 10.52,16.36 10.43,16.36 J3.16 | 10.52,16.36 10.55,16.36 10.68,16.23 12.93,16.23 EPD_C5.2 13.05,16.36 13.18,16.48 | 10.52,16.36 J3.15 | 21.05,9.98 19.43,9.98 18.68,9.23 18.18,9.23 Q1.3 | 21.05,9.98 23.05,9.98 C1-EP-DR.1 | 21.05,9.98 21.05,12.48 20.18,13.36 18.93,13.36 L5.1 18.68,13.36 17.93,13.36 14.8,16.48
  Top 0.305: 14.8,16.48 13.18,16.48
GDR  (via drill 0.15)
  Top 0.152: 12.8,22.48 12.43,22.86 10.52,22.86 J3.2 | 12.8,22.48 13.05,22.23 13.43,22.23 R2_EP_DR.2 | v14.55,20.98 14.93,20.98 15.05,20.86 Q3.1 | 12.8,22.48 v12.93,22.61
  Bottom 0.152: v12.93,22.61 v14.55,20.98
GND  (via drill 0.25)  (13 unrouted)
  Top 0.152: 28.43,15.48 29.43,15.48 U1.P$90 | 26.18,19.11 26.18,19.98 U1.P$B7 | 26.18,19.11 26.05,19.11 U1.P$75 | 26.18,19.11 27.05,19.11 U1.P$76 | 26.18,19.11 U1.P$75 | U1.P$79 26.05,17.86 27.05,17.86 U1.P$80 27.18,17.73 27.18,17.11 U1.P$74 | U1.P$88 27.05,15.48 26.05,15.48 U1.P$87 25.93,15.48 25.93,16.61 U1.P$74 | U1.P$85 28.3,16.73 27.93,17.11 27.8,17.11 U1.P$74 | U1.P$83 26.05,16.61 27.05,16.61 U1.P$84 27.18,16.73 27.3,16.73 27.68,17.11 U1.P$74 | U1.P$81 28.3,17.73 27.8,17.23 U1.P$74 | 28.43,16.61 29.43,16.61 U1.P$86 | U1.P$82 29.43,17.86 28.43,17.86 U1.P$74 | 29.43,19.11 28.43,19.11 U1.P$77 | 29.43,19.11 U1.P$78 | 29.43,19.11 U1.P$74 | U1.P$75 25.93,18.98 25.93,17.86 U1.P$74 | 28.43,16.61 28.43,15.48 | 28.43,15.48 U1.P$89 | 28.43,16.61 U1.P$74 | C10.2 33.3,19.61 33.18,19.61 32.18,18.61 30.68,18.61 30.55,18.73 U1.P$F23 30.43,18.73 29.8,18.73 29.55,18.98 U1.P$74 | IC2.C2 16.55,29.86 16.8,29.86 IC2.C1 | J1.3 J1.5 | IC3.8 IC3.9 | SW_ENT.1 35.44,3.93 v36.04,4.53 | v36.96,5.86 37.48,5.34 C6.2 | C1-EP-DR.2 23.87,8.29 v24.01,8.29 | v23.91,5.95 23.23,5.95 C30.1 | J3.MP2 EPD_C6.1
  Route2 0.152: v36.04,4.53 36.93,5.42 36.93,5.83 v36.96,5.86 | v24.01,8.29 24.01,6.03 23.93,5.95 v23.91,5.95
  pour Top: 40.68,27.35 40.67,27.38 40.67,30.82 40.68,30.84 43.67,33.84 42.39,35.12 42.37,35.14 42.36,35.17 42.36,35.81 -0.02,35.81 -0.69,35.14 -0.69,35.13 -0.7,35.13 -0.71,35.12 -0.71,35.12 -1.38,34.58 -1.38,-4.12 2.47,-7.97 5.24,-5.2 5.26,-5.19 38.87,-5.19 52.15,8.1 52.15,9.33 46.58,14.91 46.57,14.94 46.57,25.33 44.58,27.32 40.73,27.32 40.7,27.33
  pour Bottom: -1.28,-1.81 -1.29,-1.84 -2.2,-2.74 42.86,-2.74 44.81,-0.79 44.87,-0.73 44.87,4.67 44.88,4.7 48.55,8.37 48.55,22.47 44.49,26.53 41.25,26.53 41.22,26.55 40.17,27.6 40.16,27.62 40.16,30.15 40.17,30.17 45.47,35.47 45.47,36.57 0.14,36.57 -1.28,35.16
IMU_INT1  (via drill 0.15)
  Top 0.152: v23.55,16.98 24.43,16.98 U1.P$N1 | v18.3,17.23 18.18,17.11 17.93,17.11 17.55,16.73 17.55,15.98 18.05,15.98 IC3.5
  Bottom 0.152: v23.55,16.98 18.55,16.98 v18.3,17.23
IMU_INT2  (via drill 0.25)
  Top 0.03: 24.03,16.48 24.27,16.73 U1.P$P2
  Top 0.152: IC3.6 18.92,15.44 v18.97,15.49 | v23.55,16.48 24.03,16.48
  Route2 0.152: v18.97,15.49 20.07,15.49 20.7,14.86 21.84,14.86 23.48,16.49 23.54,16.49 v23.55,16.48
LX1
  Top 0.152: 16.05,29.48 16.43,29.48 IC2.B2 | 16.05,29.48 15.43,29.48 13.68,27.73 13.43,27.73 L7.1 | 16.05,29.48 IC2.B3
LX2
  Top 0.152: IC2.D3 16.43,30.23 IC2.D2 | IC2.D3 14.8,30.23 14.18,29.61 13.43,29.61 L7.2 | IC2.D3
N$1  (via drill 0.15)
  Top 0.152: v26.2,14.52 26.14,14.47 25.76,14.47 U1.P$AC5 | v26.05,11.23 25.93,11.36 25.93,12.48 26.68,12.48 C20.1
  Bottom 0.152: v26.05,11.23 25.99,11.29 25.99,14.32 v26.2,14.52
N$2
  Top 0.102: 23.63,19.08 23.92,18.8 24.92,18.8 U1.P$F2
  Top 0.152: 23.63,19.08 23.19,19.08 22.98,19.29 22.98,20.76 C18.2 22.43,20.86 22.3,20.98 22.05,20.98 21.57,21.47 18.42,21.47 18.42,22.3 17.49,23.23 17.06,23.23 16.66,23.62 17.02,23.99 X2.2
N$3  (via drill 0.15)
  Top 0.152: v24.8,20.36 25.18,19.98 U1.P$B3 | v26.68,21.98 26.8,22.11 26.8,22.61 L2.2
  Bottom 0.152: v24.8,20.36 25.05,20.36 v26.68,21.98
N$4
  Top 0.152: L2.1 26.93,23.61 27.55,23.61 28.05,24.11 28.55,24.11 L3.2
N$5  (via drill 0.15)
  Top 0.152: v30.18,19.98 30.93,19.98 U1.P$B24 | X1.1 21.8,23.23 21.18,23.23 v21.05,23.11 20.93,23.23 20.8,23.23 20.8,24.23 20.3,24.73 C1.1
  Route2 0.152: v30.18,19.98 27.05,23.11 v21.05,23.11
N$6
  Top 0.152: U1.P$A18 29.05,20.48 29.05,22.61 29.18,22.61 C13.1
N$7
  Top 0.152: U1.P$D23 30.55,19.23 30.8,19.48 31.18,19.48 33.05,21.36 35.55,21.36 35.68,21.23 35.8,21.23 C11.1
N$8  (via drill 0.15)
  Top 0.152: 34.43,19.61 34.43,20.11 34.18,20.36 v33.43,20.36 32.55,20.36 31.3,19.11 31.18,19.11 31.05,18.98 U1.P$E24 | 34.43,19.61 33.93,19.61 C10.1 | 34.43,19.61 34.55,19.61 34.55,16.86 C15.1 | U1.P$B5 25.68,19.98 25.68,21.48 26.18,21.98 26.18,24.11 27.18,25.11 28.55,25.11 L3.1 28.68,25.11 29.18,25.11 30.05,24.23 30.43,24.23 | 30.43,24.23 31.8,24.23 31.93,24.36 C16.1 | 30.43,24.23 v30.43,23.36
  Bottom 0.152: v30.43,23.36 v33.43,20.36
N$10  (via drill 0.35)
  Top 0.152: U1.P$D2 24.93,19.23 24.8,19.11 24.05,19.11 23.33,19.83 23.33,21.46 C17.2 23.05,21.73 23.05,21.98 22.68,22.36 19.51,22.36 v19.43,22.27 | v18.51,20.41 17.43,21.49 X2.1
  Route2 0.152: v19.43,22.27 18.51,21.35 v18.51,20.41
N$11
  Top 0.152: U1.P$C1 24.43,19.48 24.18,19.48 23.68,19.98 23.68,20.11 23.66,20.12 23.66,20.98 24.93,20.98 25.18,21.23 25.18,21.48 C5.1
N$12  (via drill 0.15)
  Top 0.152: 32.68,22.61 30.55,20.48 U1.P$A23 | 32.68,22.61 35.18,22.61 35.55,22.98 36.55,22.98 36.93,22.61 36.93,22.23 36.43,22.23 C2.1 | v24.18,24.36 23.43,24.36 X1.3 | 32.68,22.61 v32.68,22.73
  Bottom 0.152: v24.18,24.36 31.05,24.36 v32.68,22.73
N$14  (via drill 0.15)
  Top 0.152: v30.55,17.73 30.43,17.73 30.43,18.23 U1.P$H23 | v35.3,15.61 35.43,15.48 35.68,15.48 | 35.68,15.48 35.8,15.48 C3.1 | 35.68,15.48 36.55,16.36 38.18,16.36 L1.1
  Bottom 0.152: v30.55,17.73 33.18,17.73 v35.3,15.61
N$15
  Top 0.152: 40.3,17.23 39.55,16.48 39.3,16.48 L1.2 | 40.3,17.23 40.68,17.61 C4.1 | 42.43,19.73 41.8,19.73 40.18,18.11 40.18,17.23 40.3,17.23 | 42.43,19.73 43.3,19.73 C22.1 | 42.43,19.73 43.18,20.48 43.8,20.48 43.8,26.98 44.55,27.73 44.55,28.98 ANT1.1
N$17
  Top 0.152: R9.2 22.38,13.83 22.53,13.68 IC1.D1 22.68,12.97
N$18
  Top 0.152: U1.P$N24 31.05,16.98 31.18,17.11 31.68,17.11 31.93,16.86 C9.1
N$19  (via drill 0.15)
  Top 0.152: v17.3,30.23 16.93,30.23 IC2.D1 | v20.43,20.86 20.68,20.61 20.68,20.36 R4.2
  Bottom 0.152: v17.3,30.23 17.3,26.23 20.43,23.11 v20.43,20.86
N$20
  Top 0.152: IC3.1 19.68,16.48 20.18,16.48 21.3,17.61 R1.2
N$21
  Top 0.152: IC4.A2 17.18,2.98 17.18,4.48 15.93,4.48 15.43,4.98 15.3,4.98 15.18,4.86 15.05,4.86 C32.2
N$22
  Top 0.152: R1_USB.2 24.3,26.86 24.3,28.98 J4.A5
N$23  (via drill 0.15)
  Top 0.152: v17.3,30.98 16.93,30.61 IC2.E1 | v16.05,19.98 16.18,19.86 16.18,19.61 R2.2
  Route2 0.152: v17.3,30.98 16.05,29.73 v16.05,19.98
N$24
  Top 0.152: 3.18,29.98 2.8,30.36 2.18,30.36 D2.1 | 3.18,29.98 6.43,26.73 9.18,26.73 C2-EP-DR.1 | 3.18,29.98 D4.2
N$25  (via drill 0.15)
  Top 0.152: L5.2 18.8,12.36 v17.8,12.36 16.68,12.36 D5.2 | v10.3,26.11 9.8,26.61 C2-EP-DR.2 | v15.05,19.11 14.68,18.73 14.55,18.73 Q3.3
  Bottom 0.152: v10.3,26.11 10.3,23.86 v15.05,19.11 17.8,16.36 v17.8,12.36
N$26
  Top 0.152: R1_EP_DR.1 25.93,25.23 26.3,25.61 27.93,25.61 28.8,26.48 30.3,26.48 SJ1.2 30.43,26.61 30.43,27.36 31.18,28.11 33.8,28.11 33.93,27.98 R_TYPE_SEL.2
N$45
  Top 0.152: R2_USB.1 22.43,26.48 21.18,27.73 21.18,28.98 J4.B5
N$46
  Top 0.152: EPD_C2.2 12.43,20.48 12.43,21.48 11.43,21.48 11.05,21.86 10.52,21.86 J3.4
N$47
  Top 0.152: EPD_C1.2 12.43,18.11 11.3,19.23 11.3,21.11 11.05,21.36 10.52,21.36 J3.5
N$48
  Top 0.152: EPD_C6.2 8.68,9.61 8.68,10.86 9.18,11.36 9.18,14.86 9.8,14.86 9.93,14.98 10.05,14.86 10.34,14.86 J3.18
N$49
  Top 0.152: EPD_C7.2 10.93,8.36 10.93,10.61 10.55,10.61 9.55,11.61 9.55,14.23 9.68,14.36 10.34,14.36 J3.19
N$50
  Top 0.152: EPD_C8.2 12.55,14.48 11.55,14.48 11.05,13.98 10.46,13.98 J3.20
N$51
  Top 0.152: EPD_C10.2 13.55,11.86 12.18,11.86 11.18,12.86 10.52,12.86 J3.22
N$52
  Top 0.152: EPD_C12.2 11.93,10.23 11.43,10.73 11.3,10.73 10.18,11.86 10.18,11.98 10.39,11.98 J3.24
OUT+
  Top 0.152: IC4.A3 17.68,2.98 20.8,6.11 20.8,6.36 TP_OP.TP
P0.13/1.5D
  Top 0.152: 22.43,5.86 22.8,5.86 C30.2 | 22.43,5.86 21.3,4.73 21.3,4.36 21.43,4.36 SW_UP.2 | 22.43,5.86 22.3,5.86 22.3,6.73 21.68,7.36 21.68,7.86 R5.1
P0.14/1.5D
  Top 0.152: 29.8,3.61 32.55,3.61 SW_ENT.2 | 29.8,3.61 28.93,3.61 C31.2 | 29.8,3.61 29.05,4.36 27.8,4.36 25.05,7.11 R8.1
P1.01/1.6C
  Top 0.152: R_PWR_EPD.1 17.3,5.11 17.3,6.98 17.18,6.98 Q1.1
P1.02/1.6C
  Top 0.152: 12.68,7.11 12.8,7.23 14.3,7.23 R7.1 | 12.68,7.11 12.05,6.48 C29.2 | 12.68,7.11 10.68,7.11 10.68,3.98 SW_DN.2
PMIC_INT  (via drill 0.15)
  Top 0.152: v23.43,11.86 22.84,11.27 IC1.A1 | v24.9,15.73 24.9,16.23 U1.P$T2
  Bottom 0.152: v23.43,11.86 23.43,14.25 v24.9,15.73
PREVGH
  Top 0.3: D5.1 16.55,8.98 16.3,9.23 15.8,9.23 15.8,11.73 15.93,11.86 15.93,13.11 15.3,13.73 EPD_C9.2 14.82,13.44 J3.21
PREVGL  (via drill 0.15)
  Top 0.152: EPD_C11.2 13.55,10.48 12.96,10.48 v11.08,12.36 10.5,12.36 J3.23 | v6.43,28.11 5.68,28.11 5.68,30.36 D2.2
  Bottom 0.152: v6.43,28.11 6.43,26.61 11.08,21.95 v11.08,12.36
RESE
  Top 0.152: 13.8,20.98 13.8,20.86 Q3.2 13.8,20.98 | 13.8,20.98 13.8,21.48 14.05,21.73 14.18,21.73 14.18,22.98 16.18,24.98 17.18,24.98 17.3,24.86 17.55,24.86 18.18,25.48 23.68,25.48 24.55,24.61 25.8,24.61 R1_EP_DR.2 | 13.8,20.98 13.43,20.98 11.93,22.48 10.46,22.48 J3.3
RESET  (via drill 0.15, 0.35)
  Top 0.02: 30.24,14.33 v30.25,14.34 30.13,14.22 29.34,14.22 29.24,14.13 29.24,13.57 28.66,12.98 26.22,12.98 26.24,13 26.24,14.22 27.67,14.22 27.67,14.4 U1.P$AC13
  Top 0.152: J1.6 40.77,13.31 39.71,14.37 36.93,14.37 TP_RESET.TP 33.68,13.32 32.3,14.71 v32.01,14.42
  Route2 0.152: v32.01,14.42 31.84,14.25 30.25,14.25 v30.25,14.34
SCL/2.4C  (via drill 0.15, 0.35)
  Top 0.035: 24.04,17.73 24.68,17.73 24.75,17.66 24.75,17.5
  Top 0.042: v23.39,18.61 23.79,18.61 23.79,17.98 24.04,17.73 | 24.82,17.4 24.82,17.43 24.75,17.5
  Top 0.142: U1.P$M2 24.82,17.4
  Top 0.152: U3.7 v37.93,21.98 37.93,20.98 38.18,20.98 39.05,20.11 TP_SCL.TP | v26.8,6.61 26.93,6.48 27.18,6.48 R17.2 | v22.93,11.98 22.7,12.21 IC1.B1 | v20.68,15.48 20.18,15.98 19.8,15.98 IC3.12 | v20.68,19.36 20.68,19.73 R4.1
  Route2 0.076: v23.39,18.61 23.39,17.8 22.99,17.39 22.64,17.39 v20.68,19.36
  Route2 0.152: v20.68,15.48 v20.68,19.36
  Bottom 0.152: v26.8,6.61 22.93,10.48 v22.93,11.98 20.68,14.23 v20.68,15.48 | v37.93,21.98 32.43,21.98 30.55,23.86 25.18,23.86 v20.68,19.36
SDA/2.4C  (via drill 0.15)
  Top 0.152: U3.8 38.55,27.98 v39.3,27.23 41.93,24.61 42.3,24.61 TP_SDA.TP | 18.68,18.73 17.68,18.73 17.55,18.86 16.18,18.86 R2.1 | 18.68,18.73 19.05,19.11 19.05,19.23 18.93,19.23 R18.2 | 19.18,18.73 19.18,16.48 IC3.2 | 18.68,18.73 19.18,18.73 | U1.P$L1 24.46,17.45 23.21,17.45 23.18,17.48 | 23.18,17.48 23.05,17.48 23.05,12.35 22.79,12.62 22.61,12.62 IC1.C1 | 19.18,18.73 19.3,18.86 19.68,18.86 | 19.68,18.86 21.8,18.86 23.18,17.48 | 19.68,18.86 v19.68,18.98
  Bottom 0.152: v39.3,27.23 29.43,27.23 27.05,24.86 24.05,24.86 20.93,21.73 20.93,20.23 v19.68,18.98
SWDCLK  (via drill 0.15)
  Top 0.152: v31.43,14.98 31.05,14.98 U1.P$AA24 | TP_SWDCLK.TP 43.05,16.74 42.82,16.74 42.78,16.74 | v41.61,16.74 42.78,16.74 | J1.4 41.77,12.65 41.82,12.65 41.82,15.78 42.78,16.74
  Bottom 0.152: v31.43,14.98 38.68,14.98 40.44,16.74 v41.61,16.74
SWDIO
  Top 0.152: U1.P$AC24 31.05,14.48 36.93,8.61 36.93,6.73 TP_SWDIO.TP 40.78,6.81 40.78,10.39 J1.2
SWO
  Top 0.152: U1.P$AD22 30.05,13.98 30.05,11.11 31.3,9.86 31.43,9.86 TP_SWO.TP
VBAT/1.2A  (via drill 0.15)
  Top 0.3: 37.93,30.73 37.93,29.98 U3.2 37.8,29.98 37.55,29.98 U3.3 | 37.93,30.73 37.93,31.86 C27.2 | v40.8,24.48 40.18,23.86 40.18,23.36 TP_VBAT.TP | v38.05,30.73 37.93,30.73
  Bottom 0.3: v38.05,30.73 38.05,29.23 40.8,26.48 v40.8,24.48
VBAT/2.5C  (via drill 0.35)
  Top 0.242: C37.2 19.95,12.6
  Top 0.3: 19.95,12.6 19.78,12.6 v19.77,12.61 | v21.63,14 21.63,12.54 IC1.C2
  Route2 0.3: v19.77,12.61 21.16,14 v21.63,14
VBUS/1.5D  (via drill 0.15)
  Top 0.254: 28.68,27.65 C42.1 28.18,27.44
  Top 0.3: v21.43,26.73 20.8,26.73 C43.1 20.58,26.94 J4.A9_B4 | v31.43,29.86 31.55,29.98 31.55,30.73 D3.5 31.56,29.59 29.63,27.65 28.68,27.65
  Top 0.305: 28.18,27.44 27.69,27.92 25.88,27.92 25.38,28.43 J4.A4_B9
  Bottom 0.3: v21.43,26.73 28.3,26.73 v31.43,29.86
VBUS/2.6D
  Top 0.102: IC1.A2 21.8,11.41
  Top 0.242: 24.93,12.36 C38.2
  Top 0.3: 24.05,10.73 21.55,10.73 | 24.05,10.73 26.68,8.11 27.05,8.11 C21.1 | 24.05,10.73 24.05,12.73 | 24.05,12.73 24.05,13.11 24.93,13.98 U1.P$AD2 | 24.93,12.36 24.55,12.73 24.05,12.73
  Top 0.305: 21.8,11.41 21.55,10.73
VREG  (via drill 0.25)  (1 unrouted)
  Top 0.102: 21.66,12.14 v21.56,12.04 | v14.28,24.97 14.54,24.97 14.8,25.23
  Top 0.152: IC1.B2 21.66,12.14 | TP_VREG.TP 16.8,28.94 16.8,28.98
  Top 0.2: 14.58,25.48 C23.2
  Top 0.3: 16.44,29 IC2.A2 16.55,28.98 16.8,28.98 IC2.A1 | 14.43,25.61 14.47,25.57 | 14.47,25.57 14.8,25.23 | 14.43,25.61 13.55,25.61 12.8,24.86 12.3,24.86 C24.2 12.05,24.86 11.3,24.86 11.3,28.61 11.05,28.86 10.43,28.86 C39.1 | 14.58,25.48 14.47,25.57 | 16.05,28.98 15.93,28.98 14.93,27.98 14.93,25.73 14.43,25.73 14.43,25.61
  Top 0.305: 16.44,29 16.1,29 IC2.A3
  Route2 0.305: v21.56,12.04 21.37,11.86 15.44,11.86 13.94,13.36 13.94,24.62 v14.28,24.97